# Altium PCB ra01m.PcbDoc
Units mm, origin at the board's own origin, x right, y up, seen from the top; angles counter-clockwise.
Board outline 50 x 57 mm, 2 copper layers (Top Layer, Bottom Layer); 16 components, 19 nets, 70 pads, 293 vias.
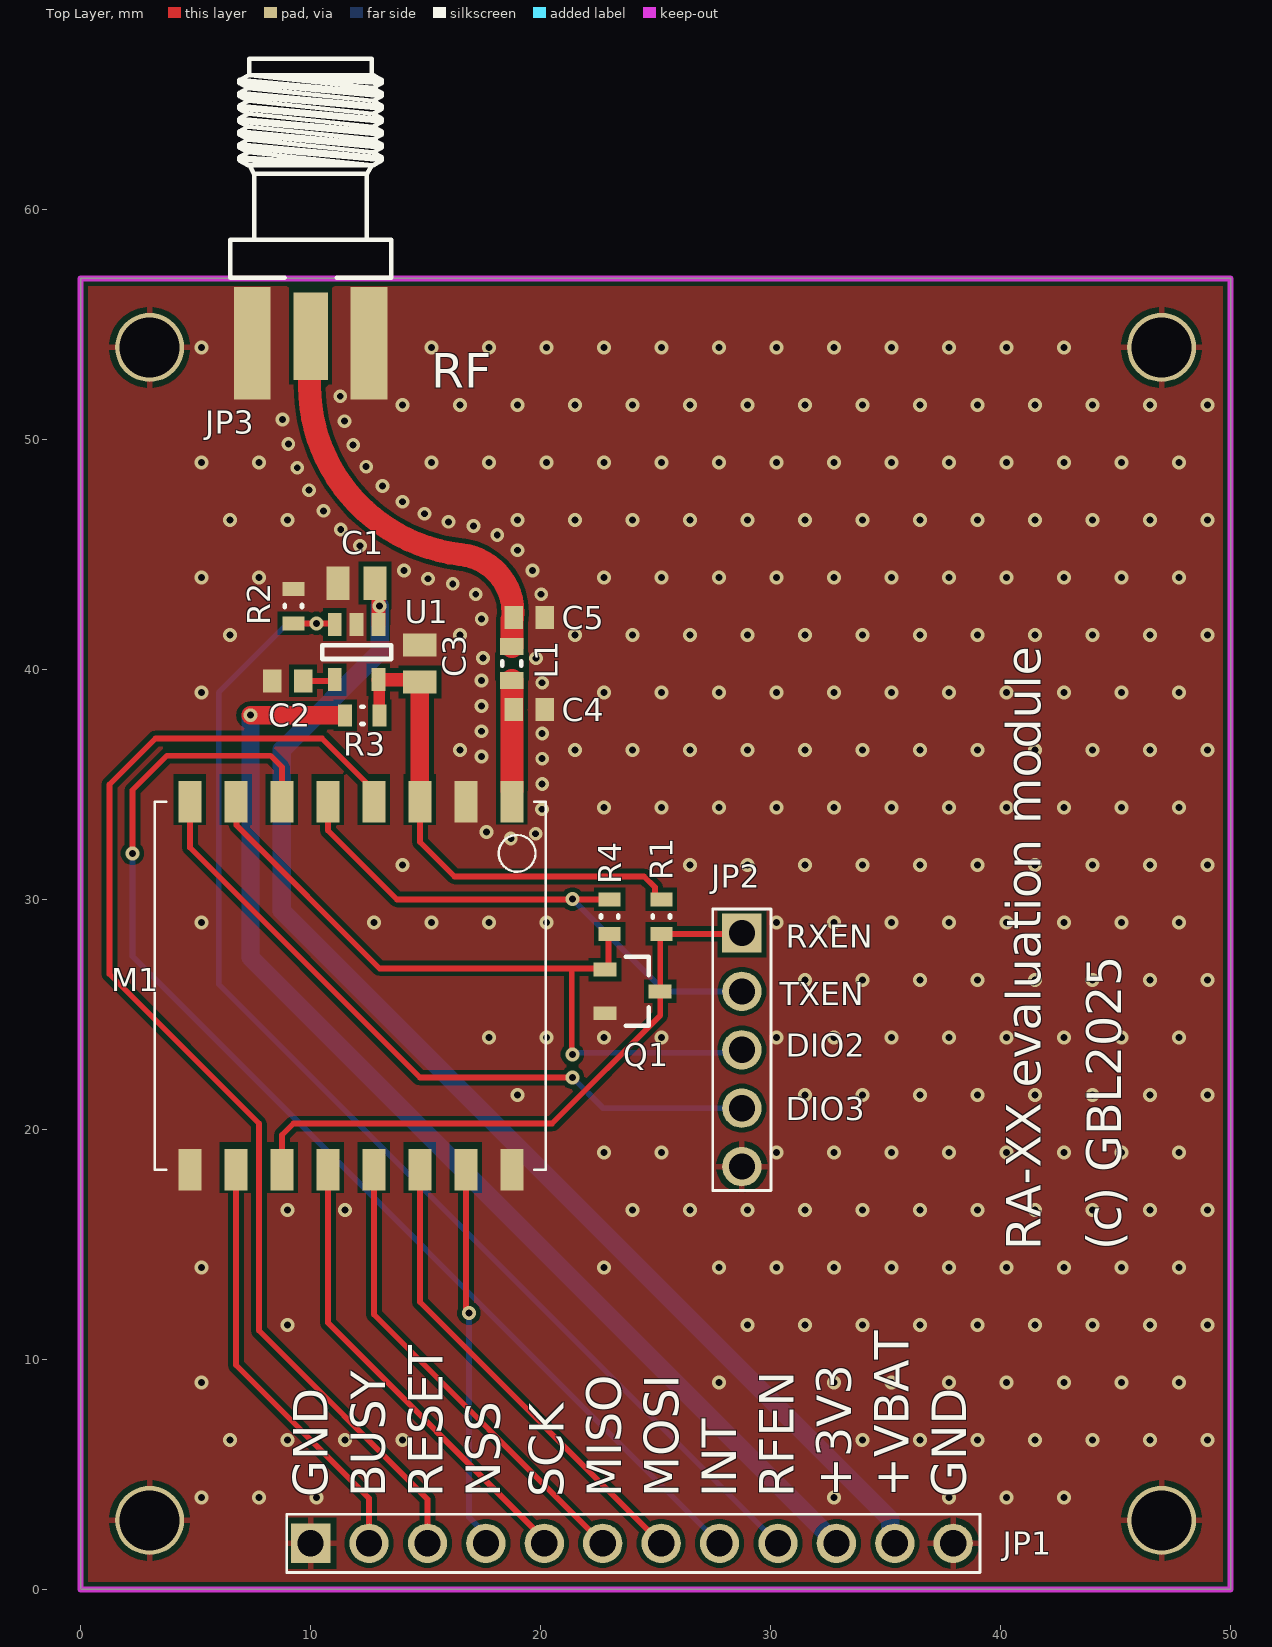
[diagram p0: Top Layer view]
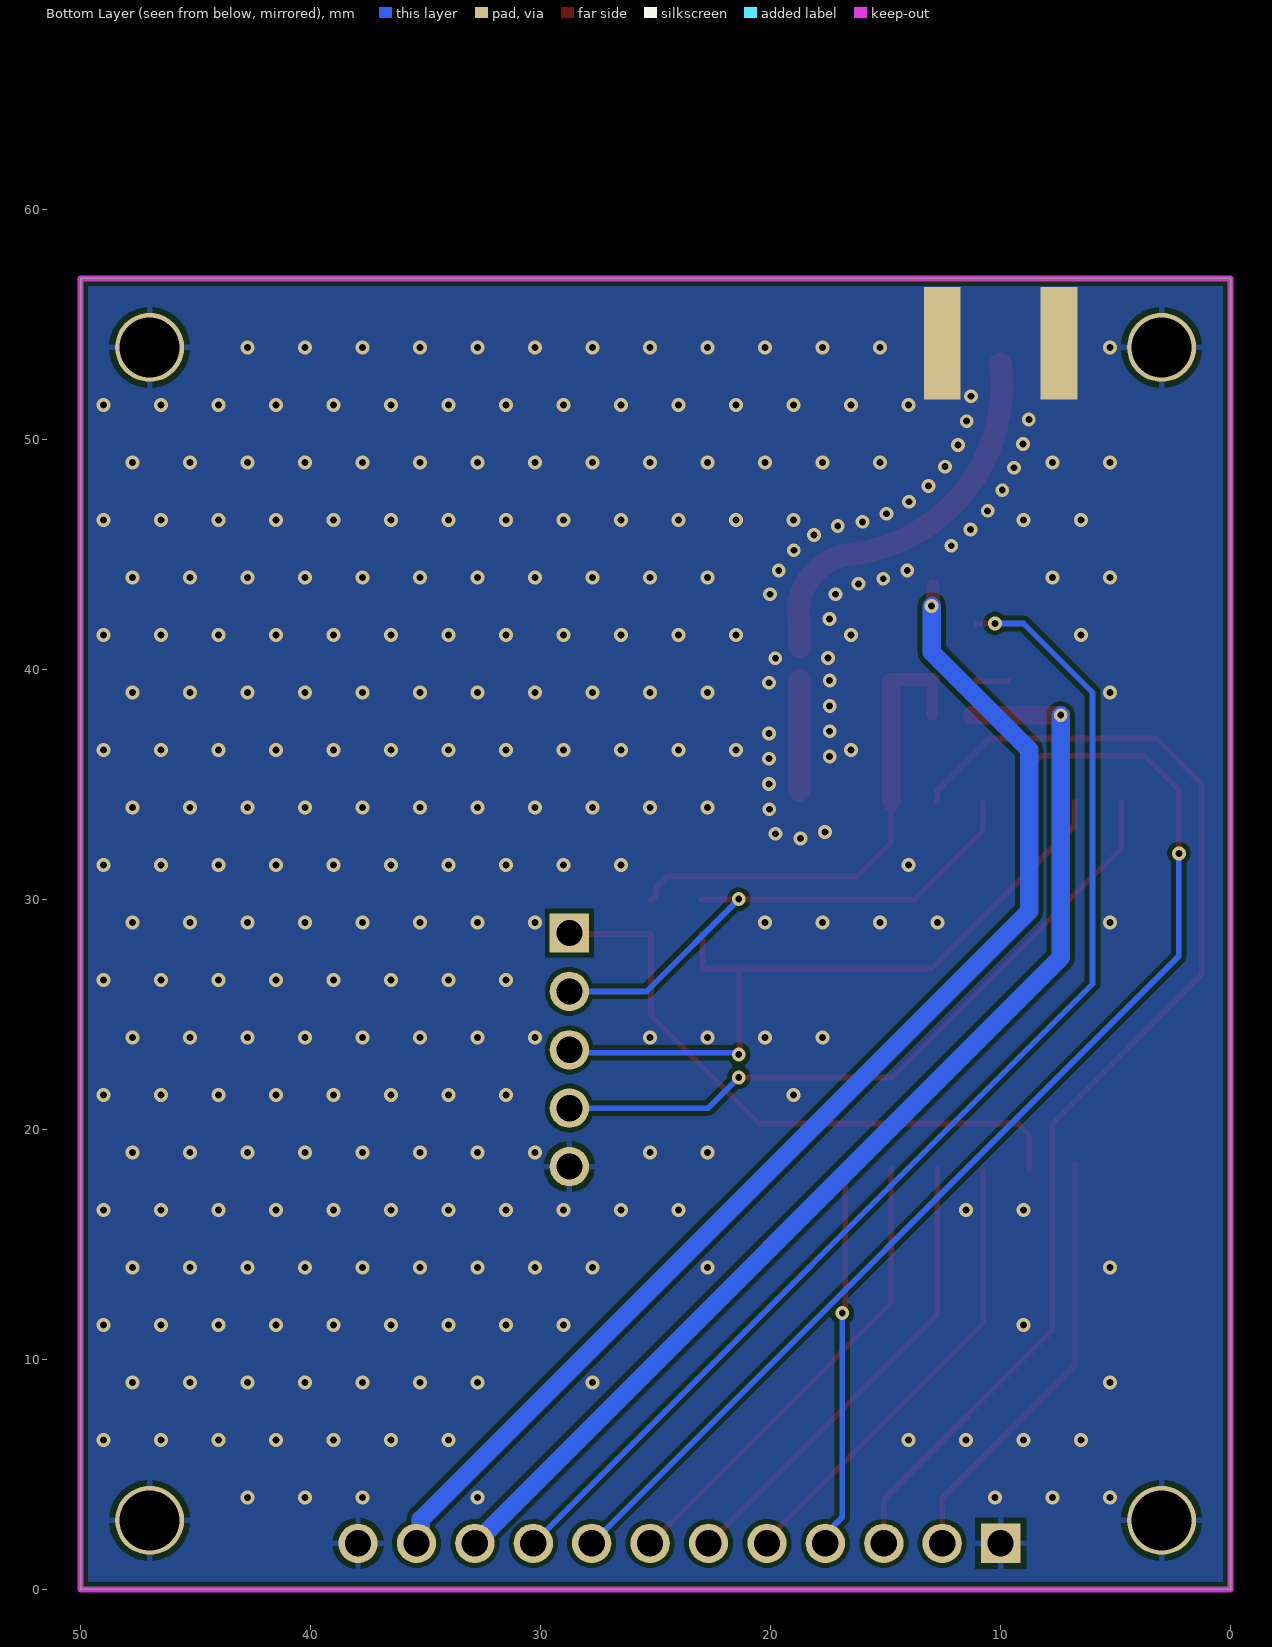
[diagram p1: Bottom Layer view, seen from below]
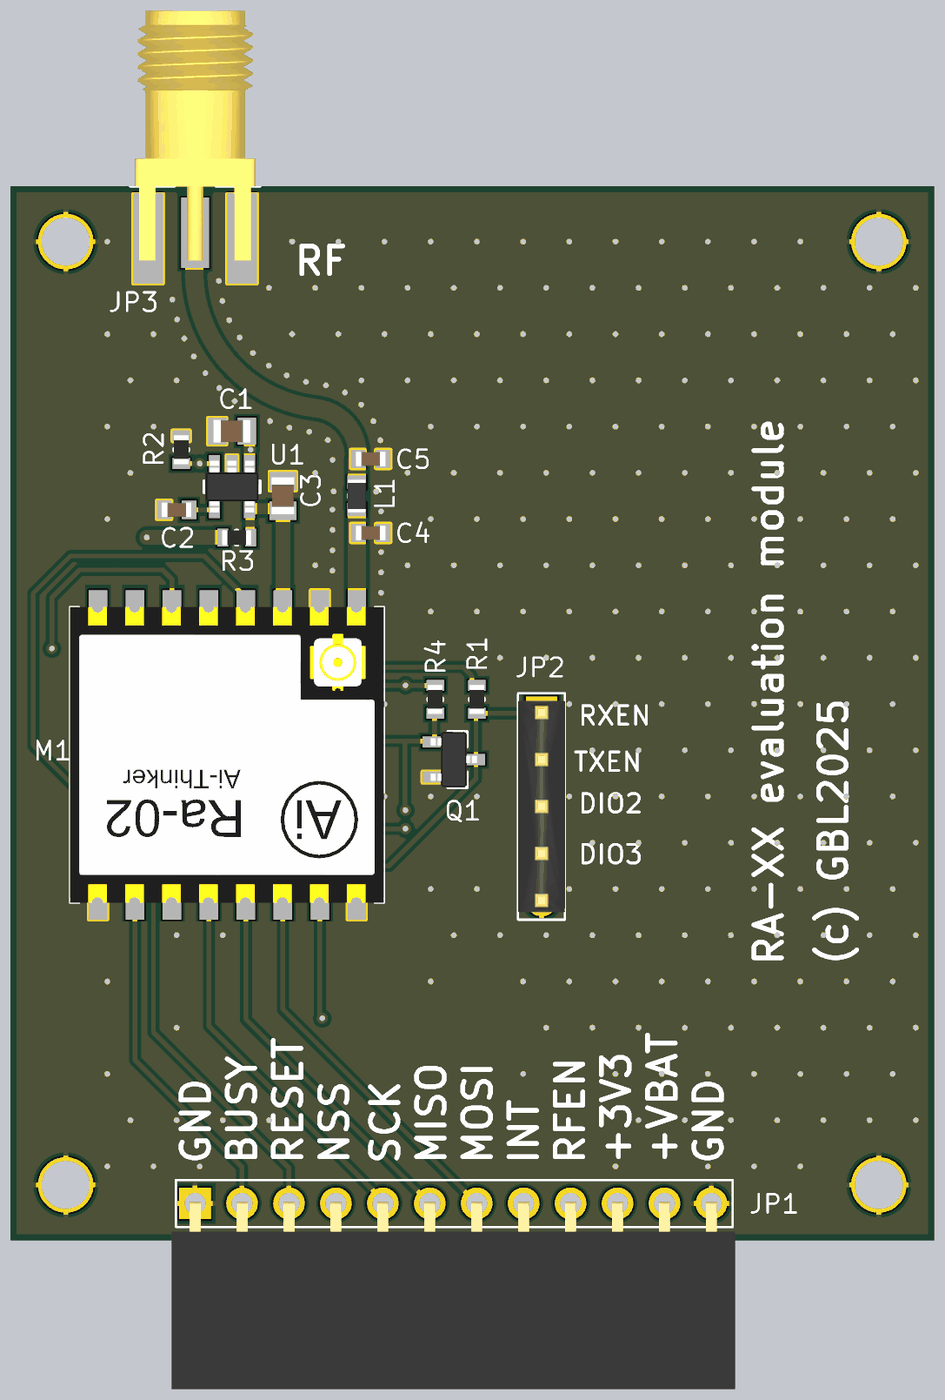
[diagram p2: 3D render of the assembled board from above, using the file's embedded part models]

## Layer stack, top to bottom
Top Solder: solder mask 0.0102, Solder Resist, Dk 3.5
Top Layer: signal copper 0.0356
Dielectric 1: dielectric 0.32, FR-4, Dk 4.8
Bottom Layer: signal copper 0.0356
Bottom Solder: solder mask 0.0102, Solder Resist, Dk 3.5

## Board outline
0,0 50,0 50,57 0,57

## Design rules (kind name [scope] priority, off if disabled: settings)
Clearance [All] p1: gap=0.2 ignorepadtopadclearanceinfootprint=FALSE
HoleSize [All] p1: absolutevalues=TRUE maxlimit=5 minlimit=0.025 maxpercent=80.000 minpercent=20.000
MinimumSolderMaskSliver [All] p1: minsoldermaskwidth=0.05
PolygonConnect PolygonConnect_1 [All vs IsNamedPolygon('GND_L01_P000') Or IsNamedPolygon('GND_L02_P001')] p1: thpad.connectstyle=Relief thpad.reliefconductorwidth=0.254 thpad.reliefentries=4 thpad.polygonreliefangle="90 Angle" thpad.airgapwidth=0.254 smdpad.connectstyle=Direct smdpad.reliefconductorwidth=0.254 smdpad.reliefentries=4 smdpad.polygonreliefangle="90 Angle" smdpad.airgapwidth=0.254 via.connectstyle=Direct via.reliefconductorwidth=0.254 via.reliefentries=4 via.polygonreliefangle="90 Angle" via.airgapwidth=0.254
PolygonConnect [All] p2: connectstyle=Relief reliefconductorwidth=0.254 reliefentries=4 polygonreliefangle="90 Angle" airgapwidth=0.254
RoutingVias [All] p1: holewidth=0.711 width=1.27 viastyle="Through Hole" minholewidth=0.711 minwidth=1.27 maxholewidth=0.711 maxwidth=1.27
SilkToSilkClearance [All] p1: silktosilkclearance=0.1
SilkToSolderMaskClearance [IsPad] p1: minsilkscreentomaskgap=0.1 clearancetoexposedcopper=TRUE
SolderMaskExpansion [All] p1: expansion=0.102 istentingtop=FALSE
Width [All] p1: maxlimit=2 minlimit=0.2 preferedwidth=0.25
26 further rules are at their usual default settings.

## Components (designator, comment, footprint, x,y, rotation, side; value= is the part's Value field where it differs from the comment)
C1 "CAPN" C-0805 12,43.75 r180 top
C2 "CAPN" C-0603 9,39.5 r180 top
C3 "CAPN" C-0805 14.75,40.25 r90 top
C4 "CAPN" C-0603 19.5,38.25 r0 top
C5 "CAPN" C-0603 19.5,42.25 r0 top
JP1 "CON12" PBS1-12R 10,2 r0 top locked
JP2 "HEADER 5" PLS1-5 28.75,28.54 r270 top
JP3 "EM-SA071-GGT" SMA_F_EDGE 10,55.75 r270 top
L1 "L" L-0603 18.75,40.25 r90 top
M1 "RA-01SH" RA01 11.725,26.25 r270 top
Q1 "MMUN2211" SOT-23 24,26 r0 top
R1 "RES" R-0603 25.25,29.25 r270 top
R2 "RES" R-0603 9.25,42.75 r270 top
R3 "RES" R-0603 12.25,38 r180 top
R4 "RES" R-0603 23,29.25 r90 top
U1 "LP5907MFX-3.0" SOT-23-5 12,40.75 r270 top

## Footprints (in the part's own frame and the unit in brackets; to place one, negate y for a bottom-side part, rotate by r counter-clockwise, add the part's x,y. Pads: shape width x height; smd on the part's side, far side on the other; paste and mask are expansions set on the pad)
C-0603 [mm] "Chip Capacitor, 2-Leads, Body 1,60x0,80mm, IPC Medium Density"
  rect 0.8x1 smd: 1(-0.675,0) 2(0.675,0)
  body extent -0.8,-0.4 0.8,0.4, height 0.8
C-0805 [mm] "Chip Capacitor, 2-Leads, Body 2,00x1,25mm, IPC Medium Density"
  rect 1x1.45 smd: 1(-0.8,0) 2(0.8,0)
  body extent -1,-0.62 1,0.63, height 1.25
L-0603 [mm] "Chip Inductor, 2-Leads, Body 1,60x0,80mm, IPC Medium Density"
  rect 0.74x1.02 smd: 1(-0.735,0) 2(0.735,0)
  silkscreen extent -0.1,-0.41 0.1,0.41, body extent -0.9,-0.5 0.9,0.5, height 1
PBS1-12R [mm] "Header, Vertical, 2.54 mm pitch; 0.70 mm lead width, 10 pins, 1 row, 10 pins per row, 24.13 mm L X 2.54 mm W X 7.54 mm H body"
  rect 1.71x1.71 hole 1.14 paste-1.71: 1(0,0)
  round 1.71 hole 1.14 paste-1.71: 2(2.54,0) 3(5.08,0) 4(7.62,0) 5(10.16,0) 6(12.7,0) 7(15.24,0) 8(17.78,0) 9(20.32,0) 10(22.86,0) 11(25.4,0) 12(27.94,0)
  silkscreen extent -1.04,-1.27 29.1,1.27, body extent -1.27,-10.03 29.21,0.1, height 2.54
PLS1-5 [mm] "Header, Vertical, 2.54 mm pitch; 0.70 mm lead width, 5 pins, 1 row, 5 pins per row, 11.43 mm L X 2.54 mm W X 7.54 mm H body"
  rect 1.71x1.71 hole 1.14 paste-1.71: 1(0,0)
  round 1.71 hole 1.14 paste-1.71: 2(2.54,0) 3(5.08,0) 4(7.62,0) 5(10.16,0)
  silkscreen extent -1.04,-1.27 11.2,1.27, body extent -0.64,-1.27 10.79,1.27, height 7.54
R-0603 [mm] "Chip Resistor, 2-Leads, Body 1,60x0,82mm, IPC Medium Density"
  rect 0.6x0.95 smd: 1(-0.75,0) 2(0.75,0)
  silkscreen extent -0.05,-0.38 0.05,0.38, body extent -0.8,-0.4 0.8,0.4, height 0.45
RA01 [mm]
  rect 1.8x1 smd: 1(-8,7.025) 2(-8,5.025) 3(-8,3.025) 4(-8,1.025) 5(-8,-0.975) 6(-8,-2.975) 7(-8,-4.975) 8(-8,-6.975) 9(8,-6.975) 10(8,-4.975) 11(8,-2.975) 12(8,-0.975) 13(8,1.025) 14(8,3.025) 15(8,5.025) 16(8,7.025)
  silkscreen extent -8,-8.5 8,8.5, body extent -8,-8.5 8,8.5, height 2.61
SMA_F_EDGE [mm] "SMA End Launch Jack for 1.58mm PCB, 50 Ohm, Flat Tab Contact"
  rect 3.81x1.5 smd: 1(1.27,0)
  rect 4.9x1.6 smd: 2(1.575,2.54) 2(1.575,-2.54)
  rect 4.9x1.6 smd far side: 2(1.575,2.54) 2(1.575,-2.54)
  silkscreen extent -10.81,-3.5 -1.28,3.5, body extent -10.73,-3.25 2.77,3.25, height 3.7
SOT-23 [mm]
  rect 1x0.6 smd: 1(-1.2,0.95) 2(-1.2,-0.95) 3(1.2,0)
  silkscreen extent -0.3,-1.5 0.7,1.5, body extent -1.25,-1.5 1.25,1.5, height 1.2
SOT-23-5 [mm] "SOT23, 5-Leads, Body 2,90x2,45mm, Pitch 0,95mm, IPC Medium Density"
  rect 1x0.6 smd: 1(-1.2,0.95) 2(-1.2,0) 3(-1.2,-0.95) 4(1.2,-0.95) 5(1.2,0.95)
  silkscreen extent -0.3,-1.5 0.3,1.5, body extent -1.4,-1.45 1.4,1.45, height 1.55

## Part data
C1 C2 C3 C4 C5: Voltage=50V, Вид=Конденсатор, Точність/група=NP0
JP1: "Connector", Вид=Роз'єм
JP3: library part SMA, "SMA Female R/A PCB Mount", Вид=Роз'єм
M1: library part RA01_02_HT_RA_62
U1: library part LP5907, "250mA Low-Dropout Regulator", Вид=Мікросхема
JP2: Вид=Роз'єм
L1: Вид=Індуктивність
Q1: Вид=Транзистор
R1 R2 R3 R4: Вид=Резистор, Точність/група=5%

## Free pads (board coordinates)
  round 3 hole 2.6: 1(3,3) 1(3,54) 1(47,3) 1(47,54)

## Via types
v1: diameter 0.6, hole 0.3, Top Layer to Bottom Layer, tented both sides, 293 vias

## Nets (pads, with @x,y where several pads share a name; then routed paths per layer and width w, separated by ;. In a path a pad name is that pad's centre, name@x,y a point inside that pad or via, vN(x,y) a via of type N, cw(c..) or ccw(c..) an arc to the next point about the centre after c; other vN are vias at no path point)
DIO2: JP2.3 M1.7 Q1.1 R4.1 | length 32.6
  Top Layer w0.25: M1.7 6.779,34.221 6.779,33.221 13,27 21.354,27 ; v1(21.384,23.26) 21.354,23.291 21.354,27 ; R4.1 22.95,28.45 22.95,26.95 22.9,27 21.95,27 21.354,27
  Bottom Layer w0.25: v1(21.384,23.26) 21.451,23.327 28.617,23.327 JP2.3
DIO3: JP2.4 M1.8 | length 30.6
  Top Layer w0.25: M1.8 4.75,32.25 14.75,22.25 v1@21.25,22.25
  Bottom Layer w0.25: v1(21.384,22.26) 22.724,20.92 JP2.4
GND: C1.2 C2.2 C3.2 C4.2 C5.2 JP1.1 JP1.12 JP2.5 JP3.2 M1.2 M1.9 M1.16 pad.1 Q1.2 R2.1 U1.2
  other v1: 5.25,4 7.75,4 10.25,4 32.75,4 37.75,4 40.25,4 42.75,4 6.5,6.5 9,6.5 11.5,6.5 14,6.5 34,6.5 36.5,6.5 39,6.5 41.5,6.5 44,6.5 46.5,6.5 49,6.5 5.25,9 27.75,9 32.75,9 35.25,9 37.75,9 40.25,9 42.75,9 45.25,9 47.75,9 9,11.5 29,11.5 31.5,11.5 34,11.5 36.5,11.5 39,11.5 41.5,11.5 44,11.5 46.5,11.5 49,11.5 5.25,14 22.75,14 27.75,14 30.25,14 32.75,14 35.25,14 37.75,14 40.25,14 42.75,14 45.25,14 47.75,14 9,16.5 11.5,16.5 24,16.5 26.5,16.5 29,16.5 31.5,16.5 34,16.5 36.5,16.5 39,16.5 41.5,16.5 44,16.5 46.5,16.5 49,16.5 22.75,19 25.25,19 30.25,19 32.75,19 35.25,19 37.75,19 40.25,19 42.75,19 45.25,19 47.75,19 19,21.5 31.5,21.5 34,21.5 36.5,21.5 39,21.5 41.5,21.5 44,21.5 46.5,21.5 49,21.5 17.75,24 20.25,24 22.75,24 25.25,24 30.25,24 32.75,24 35.25,24 37.75,24 40.25,24 42.75,24 45.25,24 47.75,24 31.5,26.5 34,26.5 36.5,26.5 39,26.5 41.5,26.5 44,26.5 46.5,26.5 49,26.5 5.25,29 12.75,29 15.25,29 17.75,29 20.25,29 30.25,29 32.75,29 35.25,29 37.75,29 40.25,29 42.75,29 45.25,29 47.75,29 14,31.5 26.5,31.5 29,31.5 31.5,31.5 34,31.5 36.5,31.5 39,31.5 41.5,31.5 44,31.5 46.5,31.5 49,31.5 18.704,32.643 19.784,32.851 17.642,32.929 20.057,33.917 22.75,34 25.25,34 27.75,34 30.25,34 32.75,34 35.25,34 37.75,34 40.25,34 42.75,34 45.25,34 47.75,34 20.067,35.017 20.067,36.117 17.433,36.21 16.5,36.5 21.5,36.5 24,36.5 26.5,36.5 29,36.5 31.5,36.5 34,36.5 36.5,36.5 39,36.5 41.5,36.5 44,36.5 46.5,36.5 49,36.5 20.067,37.217 17.433,37.31 17.433,38.41 5.25,39 22.75,39 25.25,39 27.75,39 30.25,39 32.75,39 35.25,39 37.75,39 40.25,39 42.75,39 45.25,39 47.75,39 20.067,39.417 17.433,39.51 19.795,40.483 17.5,40.5 6.5,41.5 16.5,41.5 21.5,41.5 24,41.5 26.5,41.5 29,41.5 31.5,41.5 34,41.5 36.5,41.5 39,41.5 41.5,41.5 44,41.5 46.5,41.5 49,41.5 17.436,42.197 17.181,43.267 20.024,43.265 16.179,43.719 15.101,43.941 5.25,44 7.75,44 22.75,44 25.25,44 27.75,44 30.25,44 32.75,44 35.25,44 37.75,44 40.25,44 42.75,44 45.25,44 47.75,44 14.06,44.295 19.648,44.299 18.991,45.182 12.148,45.375 18.113,45.844 11.307,46.085 17.083,46.229 15.999,46.416 6.5,46.5 9,46.5 19,46.5 21.5,46.5 24,46.5 26.5,46.5 29,46.5 31.5,46.5 34,46.5 36.5,46.5 39,46.5 41.5,46.5 44,46.5 46.5,46.5 49,46.5 14.956,46.767 10.562,46.894 13.988,47.29 9.929,47.793 13.13,47.978 9.416,48.767 12.414,48.813 5.25,49 7.75,49 15.25,49 17.75,49 20.25,49 22.75,49 25.25,49 27.75,49 30.25,49 32.75,49 35.25,49 37.75,49 40.25,49 42.75,49 45.25,49 47.75,49 11.849,49.757 9.029,49.796 11.476,50.791 8.773,50.866 14,51.5 16.5,51.5 19,51.5 21.5,51.5 24,51.5 26.5,51.5 29,51.5 31.5,51.5 34,51.5 36.5,51.5 39,51.5 41.5,51.5 44,51.5 46.5,51.5 49,51.5 11.286,51.875 5.25,54 15.25,54 17.75,54 20.25,54 22.75,54 25.25,54 27.75,54 30.25,54 32.75,54 35.25,54 37.75,54 40.25,54 42.75,54
MISO: JP1.6 M1.13 | length 20.4
  Top Layer w0.25: M1.13 12.75,11.95 JP1.6
MOSI: JP1.7 M1.14 | length 20.6
  Top Layer w0.25: M1.14 14.75,12.49 JP1.7
NetC2_1: C2.1 U1.4 | length 1.4
  Top Layer w0.25: C2.1 11,39.5 U1.4
NetC4_1: C4.1 L1.1 M1.1 | length 4.8
  Top Layer w0.25: C4.1@18.75,38.175 C4.1 C4.1@18.75,38.325
  Top Layer w1: M1.1@18.75,34.75 C4.1@18.75,38.175 ; C4.1@18.75,38.325 L1.1
NetC5_1: C5.1 JP3.1 L1.2 | length 17
  Top Layer w0.25: C5.1@18.75,42.175 C5.1
  Top Layer w1: JP3.1@10,53.25 ccw(c17.375,52.375) 16.5,45 cw(c16.25,42.462) C5.1@18.788,42.213 ; L1.2 C5.1@18.75,42.175
RF_BUSY: JP1.2 M1.10 | length 18.9
  Top Layer w0.25: M1.10@6.75,18.5 M1.10 6.75,9.75 12.54,3.96 JP1.2
RF_CS: JP1.4 M1.15 | length 16.6
  Top Layer w0.25: v1@16.75,12 M1.15
  Bottom Layer w0.25: v1(16.884,12.01) 16.884,3.131 17.62,2.395 JP1.4
RF_EN: JP1.9 R2.2 U1.3 | length 54.6
  Top Layer w0.25: R2.2@9.075,42 R2.2 v1(10.25,42) 11,42 U1.3
  Bottom Layer w0.25: v1(10.25,42) 9,42 6,39 6,26.32 JP1.9
RF_INT: JP1.8 M1.6 | length 52.2
  Top Layer w0.25: v1(2.25,32) 2.25,34.75 3.75,36.25 8.25,36.25 8.75,35.75 M1.6
  Bottom Layer w0.25: v1(2.25,32) 2.25,27.53 JP1.8
RF_RST: JP1.3 M1.4 | length 52.5
  Top Layer w0.25: M1.4 12.75,34.75 12.5,35 10.5,37 3.25,37 1.25,35 1.25,26.75 7.75,20.25 7.75,11.25 15.08,3.92 JP1.3
RXEN: JP2.1 M1.11 Q1.3 R1.2 | length 27.2
  Top Layer w0.25: M1.11 8.75,19.75 9.25,20.25 20.5,20.25 25.2,24.95 Q1.3 25.2,28.45 R1.2 28.71,28.5 JP2.1
SCK: JP1.5 M1.12 | length 20.1
  Top Layer w0.25: M1.12 10.75,11.59 20.16,2.18 JP1.5
TXEN: JP2.2 M1.5 R4.2 | length 23.8
  Top Layer w0.25: M1.5 10.75,33 13.75,30 R4.2
  Bottom Layer w0.25: v1(21.384,30.01) 25.394,26 JP2.2
V_BATT: C1.1 JP1.11 U1.1 | length 55.4
  Top Layer w0.25: C1.1 C1.1@12.95,43.6
  Top Layer w0.6: U1.1 C1.1@12.95,43.6
  Bottom Layer w0.25: JP1.11@35.205,2.195 JP1.11
  Bottom Layer w0.8: v1(13,42.75) 13,40.75 8.75,36.5 8.75,29.5 35.205,3.045 JP1.11@35.205,2.195
V_RF: C3.1 M1.3 R1.1 R3.1 U1.5 | length 22.1
  Top Layer w0.25: U1.5 U1.5@12.975,39.525 ; R3.1@12.975,38.025 R3.1 ; C3.1@14.65,39.55 C3.1 ; M1.3 14.75,32.5 16.25,31 24.5,31 24.972,30.528 24.972,30.175 25.147,30 R1.1
  Top Layer w0.5: R3.1@12.975,38.025 U1.5@12.975,39.525
  Top Layer w0.6: U1.5 C3.1@14.65,39.55
  Top Layer w0.8: M1.3 C3.1
VCC: JP1.10 R3.2 | length 50.7
  Top Layer w0.25: R3.2@11.25,38 R3.2
  Top Layer w0.8: v1(7.384,38.01) 11.24,38.01 R3.2@11.25,38
  Bottom Layer w0.8: v1(7.384,38.01) 7.384,27.476 JP1.10

## Polygon pours and split planes (outlines as drawn)
GND on Top Layer "GND_L01_P000" (solid, remove dead copper, pour order 0): 0,0 50,0 50,57 0,57
GND on Bottom Layer "GND_L02_P001" (solid, remove dead copper, pour order 1): 0,0 50,0 50,57 0,57

## Keep-outs
Keep-Out Layer:
  the board outline again, w0.254

## Other copper
Top Layer:
  pour cut-out: 18,40.75 18,39.5 19.5,39.5 19.5,40.75

## Silkscreen, mask and mechanical layers (free items; w line width, h text height)
Top Overlay:
  text "RF" at 15.254,52.254 h1.5
  text "RXEN" at 30.65,27.9 h1
  text "TXEN" at 30.4,25.4 h1
  text "DIO2" at 30.65,23.15 h1
  text "DIO3" at 30.65,20.4 h1
  text "RA-XX evaluation module" at 41.746,14.754 h1.5 r90
  text "(c) GBL2025" at 45.246,14.754 h1.5 r90
  text "GND" at 10.746,4.004 h1.5 r90
  text "BUSY" at 13.246,4.004 h1.5 r90
  text "RESET" at 15.746,4.004 h1.5 r90
  text "NSS" at 18.246,4.004 h1.5 r90
  text "SCK" at 20.996,4.004 h1.5 r90
  text "MISO" at 23.496,4.004 h1.5 r90
  text "MOSI" at 25.996,4.004 h1.5 r90
  text "INT" at 28.496,4.004 h1.5 r90
  text "RFEN" at 30.996,4.004 h1.5 r90
  text "+3V3" at 33.496,4.004 h1.5 r90
  text "+VBAT" at 35.996,4.004 h1.5 r90
  text "GND" at 38.496,4.004 h1.5 r90